# Altium PCB PCB1.PcbDoc
Units mm, origin at the board's own origin, x right, y up, seen from the top; angles counter-clockwise.
Board outline 90 x 60 mm, 2 copper layers (Top Layer, Bottom Layer); 51 components, 53 nets, 228 pads, 11 vias.
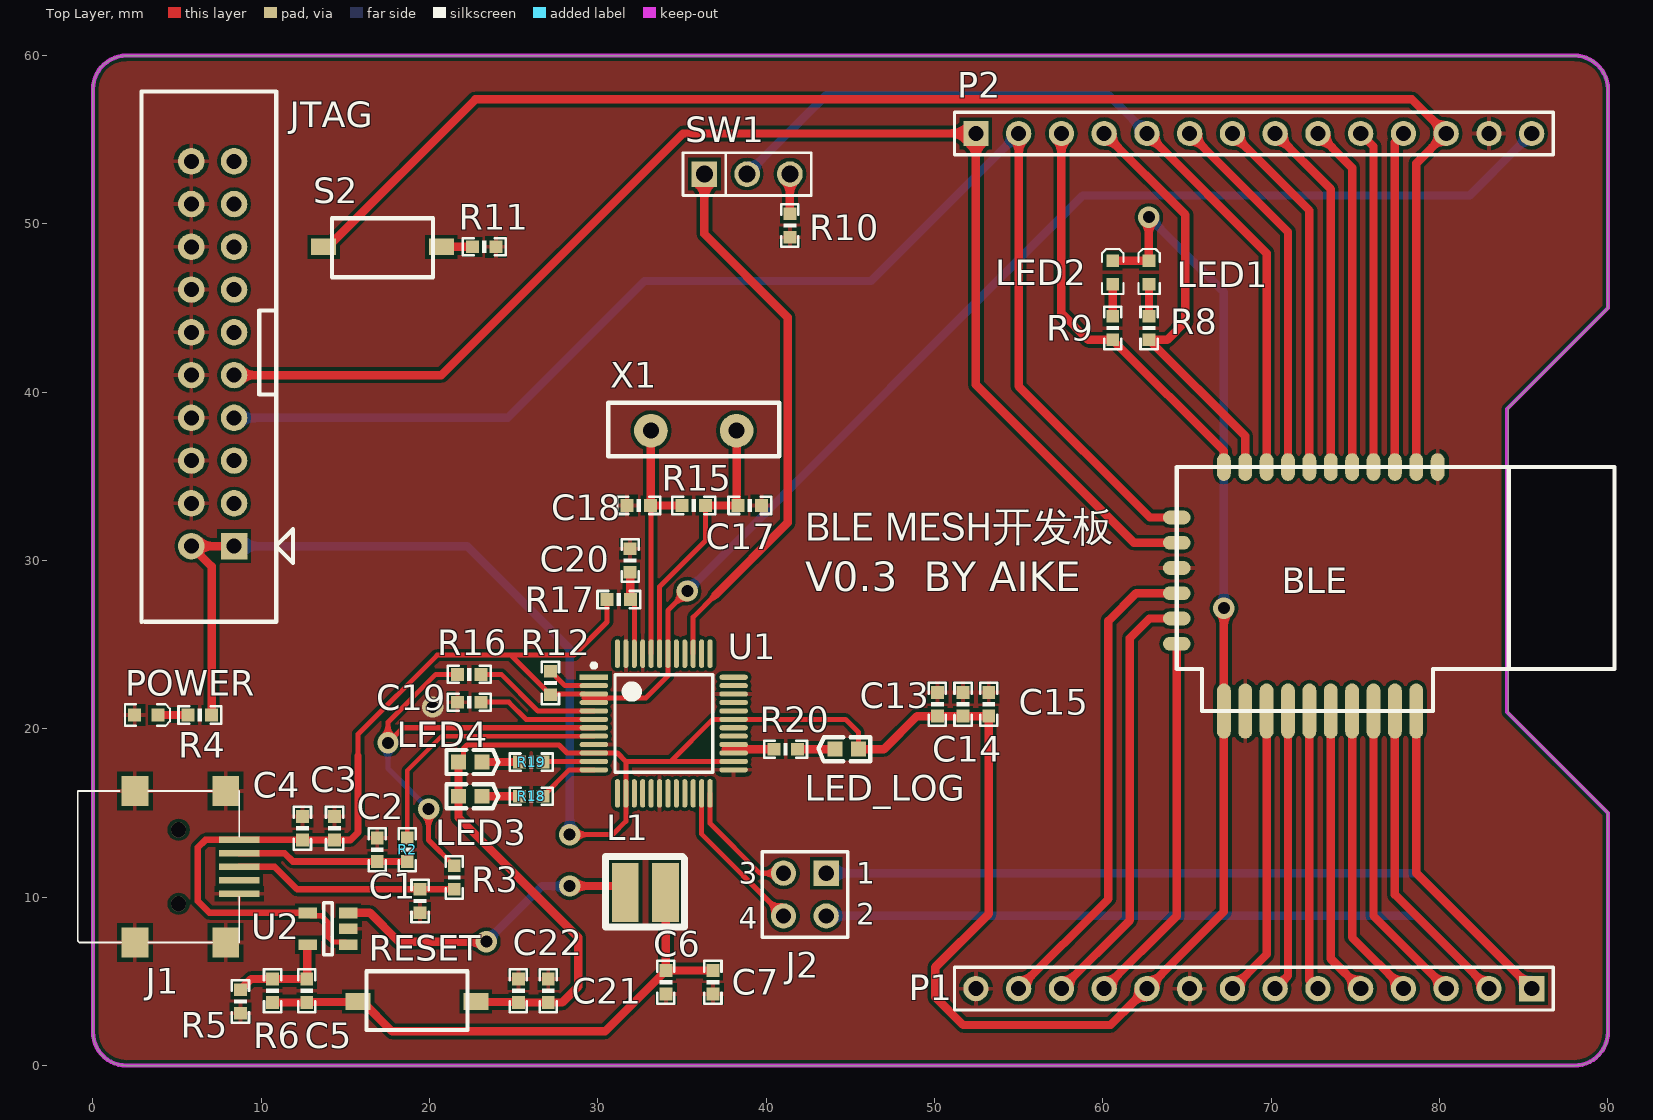
[diagram p0: Top Layer view]
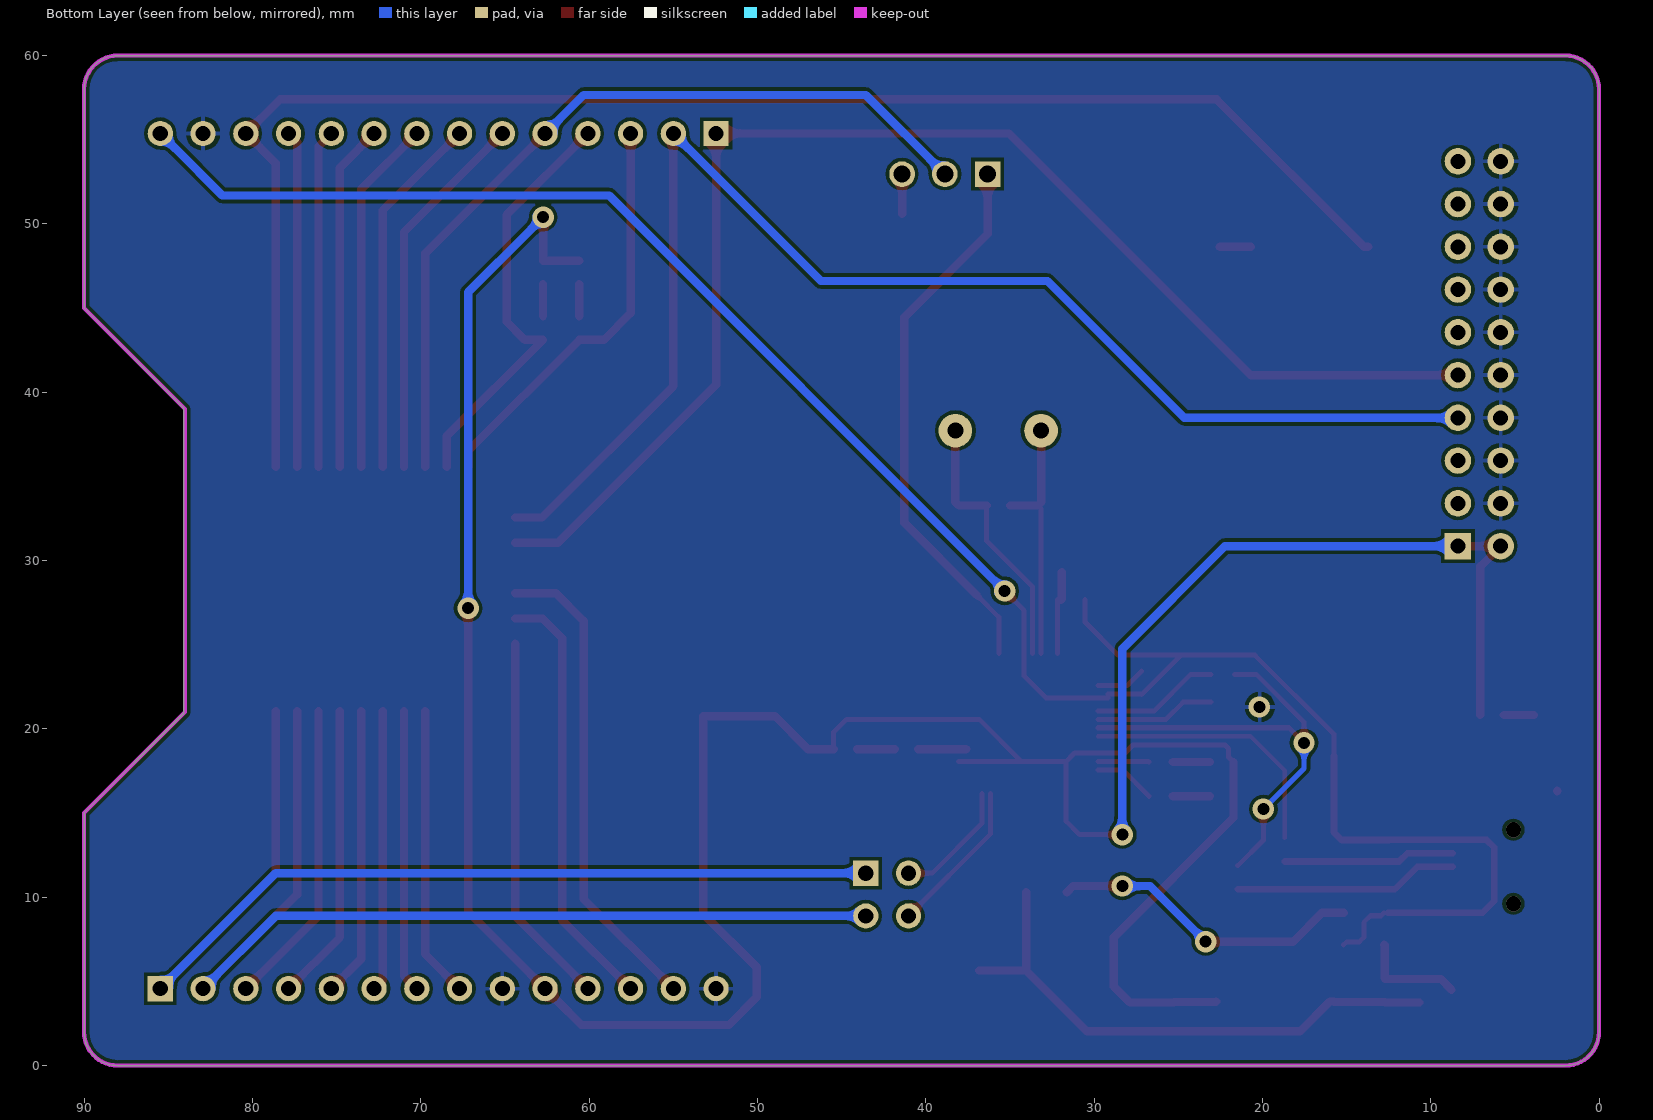
[diagram p1: Bottom Layer view, seen from below]

## Layer stack, top to bottom
Top Solder: solder mask 0.0102, Solder Resist, Dk 3.5
Top Layer: signal copper 0.0356
Dielectric 1: dielectric 0.32, FR-4, Dk 4.8
Bottom Layer: signal copper 0.0356
Bottom Solder: solder mask 0.0102, Solder Resist, Dk 3.5

## Board outline
0,2 0,58 cw(c2,58) 2,60 88,60 cw(c88,58) 90,58 90,45 84.074,39.074 84.074,20.926 90,15 90,2 cw(c88,2) 88,0 2,0 cw(c2,2)

## Design rules (kind name [scope] priority, off if disabled: settings)
Clearance Clearance_2 [InPolygon] p1: gap=0.2 ignorepadtopadclearanceinfootprint=TRUE
Clearance Clearance_1 [IsPad and InComponent(U1)] p2: gap=0.127 ignorepadtopadclearanceinfootprint=TRUE
Clearance [All] p3: gap=0.152 ignorepadtopadclearanceinfootprint=TRUE
DiffPairsRouting [All] p1: maxlimit=2.54 minlimit=0.025 mostfreqgap=0.254 toplayer_minwidth=0.025 toplayer_maxwidth=2.54 toplayer_prefwidth=0.381 bottomlayer_minwidth=0.025 bottomlayer_maxwidth=2.54 bottomlayer_prefwidth=0.381 maxuncoupledlength=12.7
PlaneClearance [All] p1: clearance=2
PolygonConnect [All] p1: connectstyle=Relief reliefconductorwidth=0.254 reliefentries=4 polygonreliefangle="90 Angle" airgapwidth=0.254
RoutingCorners [All] p1: cornerstyle=45-Degree minsetback=0.254 maxsetback=2.54
RoutingVias [All] p1: holewidth=0.711 width=1.27 viastyle="Through Hole" minholewidth=0 minwidth=0 maxholewidth=2.54 maxwidth=2.54
ShortCircuit [All] p1: allowed=TRUE
SolderMaskExpansion [All] p1: expansion=0.102
Width [All] p1: maxlimit=2.54 minlimit=0.01 preferedwidth=0.254
26 further rules are at their usual default settings.

## Components (designator, comment, footprint, x,y, rotation, side; value= is the part's Value field where it differs from the comment)
BLE "BLE" BLE 64.383,35.56 r270 top
C1 "27pF,25V" 0603P 19.431,9.779 r90 top
C2 "27pF,25V" 0603P 16.891,12.827 r270 top
C3 "10uF,10V" 0603P 14.351,14.097 r90 top
C4 "100nF,10V" 0603P 12.446,14.097 r90 top
C5 "27pF,25V" 0603P 12.7,4.445 r270 top
C6 "10uF,10V" 0603P 34.036,4.953 r90 top
C7 "100nF,10V" 0603P 36.83,4.953 r270 top
C13 "100nF" 0603P 50.165,21.463 r90 top
C14 "100nF" 0603P 51.689,21.463 r90 top
C15 "100nF" 0603P 53.213,21.463 r90 top
C17 "27pF" 0603P 39.025,33.275 r0 top
C18 "27pF" 0603P 32.425,33.275 r180 top
C19 "33nF" 0603P 22.352,21.59 r180 top
C20 "0.1uF" 0603P 31.909,30.004 r270 top
C21 "0.1uF" 0603P 27.051,4.445 r270 top
C22 "0.1uF" 0603P 25.273,4.445 r270 top
J1 "miniUSB-A" USB-min 5.588,11.811 r0 top
J2 "Header 2X2" HDR2X2 43.561,11.43 r180 top
JTAG "JTAG-20PIN" IDC20_JTAG 10.882,26.361 r90 top
L1 "2.2uH" Inductor 30.823,12.037 r270 top value=100uH
LED1 "Red" D0603 62.738,47.117 r0 top
LED2 "Green" D0603 60.579,47.117 r0 top (schematic designator LD2)
LED3 "LEDTX" LED_0603 21.717,16.002 r0 top
LED4 "LEDRX" LED_0603 21.717,18.034 r0 top
LED_LOG "LEDLOG" LED_0603 45.466,18.796 r180 top (schematic designator LED5)
P1 "Header 14" HDR1X14 85.471,4.572 r180 top
P2 "Header 14" HDR1X14 52.451,55.372 r0 top
POWER "Red" D0603 3.175,20.828 r270 top (schematic designator LED1)
R2 "27R" 0603P 18.669,12.827 r90 top
R3 "27R" 0603P 21.463,11.176 r90 top
R4 "1K" 0603P 6.35,20.828 r180 top
R5 "150K" 0603P 8.763,3.81 r270 top
R6 "680K" 0603P 10.668,4.445 r270 top
R8 "2K" 0603P 62.738,43.815 r270 top
R9 "2K" 0603P 60.579,43.815 r270 top
R10 "3.3K" 0603P 41.402,49.911 r90 top
R11 "3.3K" 0603P 23.241,48.641 r0 top
R12 "10K" 0603P 27.178,22.733 r270 top
R15 "1M" 0603P 35.687,33.274 r0 top
R16 "1.5K" 0603P 22.352,23.241 r0 top
R17 "470R" 0603P 31.242,27.686 r0 top
R18 "220R" 0603P 26.035,16.002 r180 top
R19 "220R" 0603P 26.035,18.034 r180 top
R20 "220R" 0603P 41.148,18.796 r0 top
RESET "SW-PB" buttom_sp 16.248,2.11 r0 top (schematic designator S1)
S2 "SW-PB" buttom_sp 20.201,50.341 r180 top
SW1 "SW-SPDT" SIP3 36.322,52.959 r0 top
U1 "FT2232D" TQFN48 33.909,20.32 r0 top
U2 "TLV62565DBVR" DBV0005A 13.97,8.128 r180 top value=Value
X1 "XTAL" XTAL 33.147,37.719 r0 top

## Footprints (in the part's own frame and the unit in brackets; to place one, negate y for a bottom-side part, rotate by r counter-clockwise, add the part's x,y. Pads: shape width x height; smd on the part's side, far side on the other; paste and mask are expansions set on the pad)
0603P [mil]
  rect 30x30 smd: 1(-27.5,0) 2(27.5,0)
  silkscreen extent -50,-20 50,20
BLE [mm]
  rrect100% 3.28x0.82 smd: 1(14.5,14.23) 2(14.5,12.96) 3(14.5,11.69) 4(14.5,10.42) 5(14.5,9.15) 6(14.5,7.88) 7(14.5,6.61) 8(14.5,5.34) 9(14.5,4.07) 10(14.5,2.8)
  rrect100% 0.82x1.64 smd: 11(10.5,0) 12(9,0) 13(7.5,0) 14(6,0) 15(4.5,0) 16(3,0)
  rrect100% 1.64x0.82 smd: 17(0,2.8) 18(0,4.07) 19(0,5.34) 20(0,6.61) 21(0,7.88) 22(0,9.15) 23(0,10.42) 24(0,11.69) 25(0,12.96) 26(0,14.23) 27(0,15.5)
  silkscreen extent 0,0 14.5,26
buttom_sp [mm]
  rect 1.5x1 smd: 1(-0.5,1.7) 2(6.5,1.7)
  silkscreen extent 0,0 6,3.5
D0603 [mil]
  rect 30x30 smd: 1(0,27.5) 2(0,-27.5)
  silkscreen extent -25,-50 25,55
DBV0005A [mm]
  rect 1.1x0.65 smd paste-0.102 mask+0.051: 1(-1.2,0.95) 2(-1.2,0) 3(-1.2,-0.95) 4(1.2,-0.95) 5(1.2,0.95)
  silkscreen extent -0.25,-1.55 0.25,1.55, body extent 0,0 0.25,0.25, height 0.25
HDR1X14 [mm] "Connector; Header; 14 Position"
  rect 1.5x1.5 hole 0.9: 1(0,0)
  round 1.5 hole 0.9: 2(2.54,0) 3(5.08,0) 4(7.62,0) 5(10.16,0) 6(12.7,0) 7(15.24,0) 8(17.78,0) 9(20.32,0) 10(22.86,0) 11(25.4,0) 12(27.94,0) 13(30.48,0) 14(33.02,0)
  silkscreen extent -1.27,-1.27 34.29,1.27
HDR2X2 [mm] "Connector; Header; 2x2 Position"
  rect 1.5x1.5 hole 0.9: 1(0,0)
  round 1.5 hole 0.9: 2(0,2.54) 3(2.54,0) 4(2.54,2.54)
  silkscreen extent -1.27,-1.27 3.81,3.81
IDC20_JTAG [mil] "for 20-pin JTAG"
  rect 62x62 hole 35: 1(177.16,98.43)
  round 62 hole 35: 2(177.16,198.43) 3(277.16,98.43) 4(277.16,198.43) 5(377.16,98.43) 6(377.16,198.43) 7(477.16,98.43) 8(477.16,198.43) 9(577.16,98.43) 10(577.16,198.43) 11(677.16,98.43) 12(677.16,198.43) 13(777.16,98.43) 14(777.16,198.43) 15(877.16,98.43) 16(877.16,198.43) 17(977.16,98.43) 18(977.16,198.43) 19(1077.16,98.43) 20(1077.16,198.43)
  silkscreen extent 0,-39 1240,315
Inductor [mm] "Chip Inductor, Body 0.6x0.3mm, IPC High Density"
  rect 3.5x1.6 smd: 1(1.75,0.8) 2(1.75,3.2)
  silkscreen extent -0.38,-0.38 3.81,4.32
LED_0603 [mil]
  rect 35x35 smd: 1(0,0) 2(55,0)
  silkscreen extent -28,-28 93,28
SIP3 [mil]
  rect 60x60 hole 40: 1(0,0)
  round 60 hole 40: 2(100,0) 3(200,0)
  silkscreen extent -50,-50 250,50
TQFN48 [mm]
  rect 1.7x0.3 smd: 1(-4.15,2.75)
  oval 1.7x0.3 smd: 2(-4.15,2.25) 3(-4.15,1.75) 4(-4.15,1.25) 5(-4.15,0.75) 6(-4.15,0.25) 7(-4.15,-0.25) 8(-4.15,-0.75) 9(-4.15,-1.25) 10(-4.15,-1.75) 11(-4.15,-2.25) 12(-4.15,-2.75) 25(4.15,-2.75) 26(4.15,-2.25) 27(4.15,-1.75) 28(4.15,-1.25) 29(4.15,-0.75) 30(4.15,-0.25) 31(4.15,0.25) 32(4.15,0.75) 33(4.15,1.25) 34(4.15,1.75) 35(4.15,2.25) 36(4.15,2.75)
  oval 0.3x1.7 smd: 13(-2.75,-4.15) 14(-2.25,-4.15) 15(-1.75,-4.15) 16(-1.25,-4.15) 17(-0.75,-4.15) 18(-0.25,-4.15) 19(0.25,-4.15) 20(0.75,-4.15) 21(1.25,-4.15) 22(1.75,-4.15) 23(2.25,-4.15) 24(2.75,-4.15) 37(2.75,4.15) 38(2.25,4.15) 39(1.75,4.15) 40(1.25,4.15) 41(0.75,4.15) 42(0.25,4.15) 43(-0.25,4.15) 44(-0.75,4.15) 45(-1.25,4.15) 46(-1.75,4.15) 47(-2.25,4.15) 48(-2.75,4.15)
  silkscreen extent -4.27,-2.9 2.9,3.57, body extent -3.6,-3.6 3.6,3.6, height 1.6
USB-min [mm]
  rect 1.6x1.8 smd: 0(-3.1,-4.5) 0(-3.1,4.5) 0(2.3,-4.5) 0(2.3,4.5)
  rect 2.4x0.4 smd: 1(3.1,1.6) 2(3.1,0.8) 3(3.1,0) 4(3.1,-0.8) 5(3.1,-1.6)
  silkscreen extent -6.5,-4.5 3.1,4.5
XTAL [mm]
  round 2 hole 0.95: 1(0,0) 2(5.09,0)
  silkscreen extent -2.54,-1.52 7.62,1.65

## Part data
C1 C2 C3 C4 C5 C6 C7 C13 C14 C15 C17 C18 C19 C20 C21 C22: library part CAP, "Capacitor"
J1: "miniUSB-A  interface"
J2: "Header, 2-Pin, Dual row", LatestRevisionDate=17-Jul-2002, LatestRevisionNote="Re-released for DXP Platform.", Publisher="Altium Limited"
JTAG: library part ARM_JTAG, "ARM_JTAG-20PIN"
L1: library part Inductor, "Inductor", Published=8-Jun-2000, Publisher="Altium Limited", Revision="July-2002: Re-released for DXP Platform."
LED1 LED2 POWER: library part LED2, "Typical RED, GREEN, YELLOW, AMBER GaAs LED", Published=8-Jun-2000, Publisher="Altium Limited", Revision="July-2002: Re-released for DXP Platform."
LED3 LED4 LED_LOG: library part LED, Part Field 1=0, Part Field 2=0, Part Field 3=0, Part Field 4=0, Part Field 5=1, Part Field 6=0, Part Field 7=1n, Part Field 8=1n, Part Field 9=500n, Part Field 10=1u
P1 P2: "Header, 14-Pin", LatestRevisionDate=17-Jul-2002, LatestRevisionNote="Re-released for DXP Platform.", Publisher="Altium Limited"
R2 R3 R4 R5 R6 R8 R9 R10 R11 R12 R15 R16 R17 R18 R19 R20: library part R, Bottom=30, Right=20
RESET S2: "Switch", LatestRevisionDate=17-Jul-2002, LatestRevisionNote="Re-released for DXP Platform.", PackageDescription="Switch; 2 Leads", PackageReference=SPST-2, Published=24-Mar-1999, Publisher="Altium Limited"
SW1: "SPDT Subminiature Toggle Switch, Right Angle Mounting, Vertical Actuation", Datasheet="Latest Revision: 05-Dec-2000", Published=24-Mar-1999, Publisher="Altium Limited", Revision 1="Jul-2002: Re-released for DXP Platform.", Revision 2="17-Dec-2003: Schematic revised, PCB Footprint replaced."
U1: library part FD2232D
U2: "Imported", Alternate_Manufacturer=None, CurrentDate=07/22/2019, CurrentTime=20:07:01, Manufacturer="Texas Instruments", PartNumber=TLV62565DBV, Address1="Not shown in title block", Address2="Not shown in title block", Address3="Not shown in title block", Address4="Not shown in title block", ApprovedBy="Not shown in title block", Author="Not shown in title block", CheckedBy="Not shown in title block", CompanyName="Not shown in title block", ComponentLink1Description="Datasheet Link", ComponentLink1URL=http://www.ti.com/lit/ds/symlink/tlv62565.pdf, CompType=IC, Date="Not shown in title block", DocumentFullPathAndName=C:\Users\user\Desktop\UGEN_7001_DEV_BOARD_V1\PCB_Project\Sheet1.SchDoc, DocumentName=Sheet1.SchDoc, DocumentNumber=1, Engineer="Not shown in title block", ImagePath="Not shown in title block", LatestRevisionDate=2014-02-20, ModifiedDate=07/22/2019, MountType=SMT, Organization="Not shown in title block", PackageReference=DBV0005A, PIN_COUNT=5, ProjectName=PCB_Project.PrjPcb, Publisher="Texas Instruments", RefDes=Refdes, Revision="Use project parameter SCH_Rev", RoHS=Y, SheetNumber=1, SheetTotal=1, SymbolCreator=a0411947, SymbolVersion=2014-02-06, Time="Not shown in title block", Type=Type, U/M=EA
X1: =6M

## Via types
v1: diameter 1.27, hole 0.711, Top Layer to Bottom Layer, 9 vias
v2: diameter 0.9, hole 0.9, Top Layer to Bottom Layer, 2 vias

## Nets (pads, with @x,y where several pads share a name; then routed paths per layer and width w, separated by ;. In a path a pad name is that pad's centre, name@x,y a point inside that pad or via, vN(x,y) a via of type N, cw(c..) or ccw(c..) an arc to the next point about the centre after c; other vN are vias at no path point)
ADC1: BLE.3 P1.3 | length 20.2
  Top Layer w0.5: BLE.3 76.073,8.89 P1.3 ; P1.3@79.895,4.595 ccw(c78.85,4.65) 79.525,5.45 ccw(c80.325,6.125) P1.3@80.38,5.08
ADC2: BLE.11 P1.11 | length 24.2
  Top Layer w0.5: P1.11 64.383,8.884 BLE.11 ; P1.11@60.095,5.08 ccw(c60.15,6.125) 60.95,5.45 ccw(c61.625,4.65) P1.11@60.58,4.595
FT_RX: J2.4 U1.23 | length 10.8
  Top Layer w0.3: U1.23 36.159,13.752 J2.4 ; J2.4@40.423,9.002 ccw(c39.478,9.11) 40.225,9.7 ccw(c40.815,10.447) J2.4@40.923,9.502
FT_TX: J2.3 U1.24 | length 8.7
  Top Layer w0.3: U1.24 36.659,14.391 39.62,11.43 J2.3 ; J2.3@40.486,11.148 ccw(c39.811,10.473) 39.875,11.425 ccw(c39.811,12.377) J2.3@40.486,11.702
GND: BLE.9 BLE.14 BLE.27 C1.1 C2.1 C3.2 C4.2 C6.1 C7.2 C13.2 C14.2 C15.2 C17.2 C18.2 C19.2 C20.1 C21.1 C22.1 J1.0 J1.5 JTAG.4 JTAG.6 JTAG.8 JTAG.10 JTAG.12 JTAG.14 JTAG.16 JTAG.18 JTAG.20 P1.9 P1.14 P2.13 POWER.2 R5.2 R10.1 R11.2 U1.9 U1.18 U1.25 U1.34 U1.45 U1.47 U2.2 | length 0
  Top Layer w0.508: J1.0@2.477,16.322 J1.0@2.488,16.311
  other v1: 20.175,21.3
GPIO0_0: BLE.17 P2.3 R9.2 | length 26.5
  Top Layer w0.5: P2.3@57.171,55.02 cw(c56.356,54.179) 57.527,54.209 ; 57.525,54.2 cw(c58.696,54.169) P2.3@57.881,55.011 ; P2.3 57.531,44.704 59.118,43.117 R9.2 67.183,36.513 BLE.17
GPIO0_1: BLE.18 P2.4 R8.2 | length 27.6
  Top Layer w0.5: P2.4 64.897,50.546 64.897,44.196 63.818,43.117 R8.2 68.453,37.402 BLE.18 ; P2.4@60.095,54.87 cw(c60.15,53.825) 60.95,54.5 cw(c61.625,55.3) P2.4@60.58,55.355
I2C_SCL: BLE.13 P1.13 | length 30.7
  Top Layer w0.5: P1.13 60.325,9.906 60.325,26.416 61.969,28.06 BLE.13 ; P1.13@54.995,5.08 ccw(c55.05,6.125) 55.85,5.45 ccw(c56.525,4.65) P1.13@55.48,4.595
I2C_SDA: BLE.12 P1.12 | length 27.7
  Top Layer w0.5: P1.12 61.595,8.636 61.595,25.4 62.755,26.56 BLE.12 ; P1.12@57.545,5.08 ccw(c57.6,6.125) 58.4,5.45 ccw(c59.075,4.65) P1.12@58.03,4.595
LOG_TX: SW1.1 U1.39 | length 35.4
  Top Layer w0.3: U1.39 35.659,26.642 36.983,27.966 ; 36.884,27.998 cw(c35.978,28.29) 36.725,27.7 cw(c37.315,26.953) 37.019,27.858
  Top Layer w0.5: SW1.1@35.971,52.32 cw(c35.156,51.479) 36.327,51.509 ; SW1.1 36.322,49.403 41.275,44.45 41.275,32.258 36.983,27.966 ; 36.325,51.5 cw(c37.496,51.469) SW1.1@36.681,52.311
LTX: BLE.19 P2.5 SW1.2 | length 55.2
  Top Layer w0.5: P2.5 69.723,48.26 BLE.19 ; P2.5@62.62,54.87 cw(c62.675,53.825) 63.475,54.5 cw(c64.15,55.3) P2.5@63.105,55.355
  Bottom Layer w0.5: SW1.2 43.561,57.658 60.325,57.658 P2.5 ; SW1.2@38.895,53.48 ccw(c38.95,54.525) 39.75,53.85 ccw(c40.425,53.05) SW1.2@39.38,52.995 ; P2.5@62.095,55.395 ccw(c61.05,55.45) 61.725,56.25 ccw(c62.525,56.925) P2.5@62.58,55.88
NetC1_2: C1.2 J1.3 R3.1 | length 13.3
  Top Layer w0.4: J1.3 10.795,11.811 12.129,10.477 C1.2 R3.1
NetC2_2: C2.2 J1.2 R2.1 | length 10.2
  Top Layer w0.4: J1.2 11.392,12.611 11.874,12.129 C2.2 R2.1
NetC5_1: C5.1 R5.1 R6.1 U2.5 | length 6.3
  Top Layer w0.5: R5.1 9.398,5.144 R6.1 C5.1 12.735,5.179 12.735,7.143 U2.5
NetC5_2: C5.2 C6.2 C7.1 L1.2 R6.2 RESET.1 | length 33.1
  Top Layer w0.5: R6.2 C5.2 12.732,3.778 15.716,3.778 RESET.1 15.998,3.81 17.776,2.032 30.417,2.032 C6.2 ; L1.2 34.036,10.274 C6.2 ; C7.1 C6.2
NetC17_1: C17.1 R15.2 U1.43 X1.2 | length 16.1
  Top Layer w0.3: U1.43 33.659,28.452 36.385,31.178 R15.2
  Top Layer w0.5: R15.2 38.036,33.274 38.237,33.475 X1.2
NetC18_1: C18.1 R15.1 U1.44 X1.1 | length 15.1
  Top Layer w0.3: U1.44 33.159,33.095 C18.1@33.338,33.274
  Top Layer w0.5: X1.1 33.147,33.465 33.338,33.274 R15.1
NetC19_1: C19.1 U1.6 | length 7.1
  Top Layer w0.3: C19.1 24.702,21.59 25.722,20.57 U1.6
NetC20_2: C20.2 R17.2 U1.46 | length 4.8
  Top Layer w0.3: U1.46 R17.2@32.159,27.686
  Top Layer w0.5: C20.2 31.925,29.29 31.925,27.702 R17.2
NetL1_1: L1.1 U2.3 | length 25.1
  Top Layer w0.5: U2.3 16.449,9.078 18.161,7.366 v1(23.368,7.366) ; v1@23.101,7.63 cw(c22.348,8.528) 22.379,7.357 cw(c22.348,6.185) v1@23.117,7.069 ; v1(28.321,10.668) 31.242,10.668 L1.1 ; v1@28.583,10.956 ccw(c29.352,11.84) 29.321,10.668 ccw(c29.352,9.497) v1@28.599,10.395
  Bottom Layer w0.5: v1@23.245,7.73 ccw(c23.3,8.775) 23.975,7.975 ccw(c24.775,7.3) v1@23.73,7.245 ; v1(23.368,7.366) 26.67,10.668 v1(28.321,10.668) ; v1@28.051,10.93 cw(c27.298,11.828) 27.329,10.657 cw(c27.298,9.485) v1@28.067,10.369
NetLED1_2: LED1.2 R8.1 | length 1.9
  Top Layer w0.5: R8.1 LED1.2
NetLED2_2: LED2.2 R9.1 | length 1.9
  Top Layer w0.5: R9.1 LED2.2
NetLED3_2: LED3.2 R18.2 | length 2.2
  Top Layer w0.5: LED3.2 R18.2
NetLED4_2: LED4.2 R19.2 | length 2.2
  Top Layer w0.5: LED4.2 R19.2
NetLED_LOG_2: LED_LOG.2 R20.2 | length 2.2
  Top Layer w0.5: R20.2 LED_LOG.2
NetPOWER_1: POWER.1 R4.2 | length 1.8
  Top Layer w0.5: POWER.1 R4.2
NetR2_2: R2.2 U1.8 | length 15.9
  Top Layer w0.254: R2.2 18.669,17.526 20.713,19.57 U1.8
NetR3_2: R3.2 R16.1 U1.7 | length 32.2
  Top Layer w0.3: v1@17.248,19.589 ccw(c16.573,20.264) 17.525,20.2 ccw(c18.477,20.264) 17.526,20.186 ; v1@17.802,19.589 cw(c18.477,20.264) 17.526,20.186 ; v1@19.662,14.836 cw(c18.987,14.16) 19.939,14.224 ; v1(19.939,15.24) 19.939,14.224 ; v1@20.216,14.836 ccw(c20.891,14.16) 19.939,14.224 ; R3.2 19.939,13.398 19.939,14.224 ; R16.1 20.366,23.241 17.526,20.401 17.526,20.186 ; U1.7 18.419,20.07 v1(17.526,19.177) 17.526,20.186
  Bottom Layer w0.3: v1@17.248,18.761 cw(c16.573,18.086) 17.525,18.15 cw(c18.477,18.086) v1@17.802,18.761 ; v1(17.526,19.177) 17.526,17.653 v1(19.939,15.24)
NetR10_2: R10.2 SW1.3 | length 4.2
  Top Layer w0.5: SW1.3@41.046,52.595 cw(c40.231,51.754) 41.402,51.784 ; 41.4,51.775 cw(c42.571,51.744) SW1.3@41.756,52.586 ; R10.2 SW1.3
NetR11_1: R11.1 S2.1 | length 1.8
  Top Layer w0.5: S2.1 R11.1
NetR12_1: R12.1 U1.2 | length 2.9
  Top Layer w0.3: R12.1 28.04,22.57 U1.2
NetR16_2: R16.2 U1.5 | length 7.6
  Top Layer w0.3: R16.2 24.257,23.241 26.428,21.07 U1.5
NetR18_1: R18.1 U1.12 | length 3.7
  Top Layer w0.3: R18.1 28.302,17.57 U1.12
NetR19_1: R19.1 U1.11 | length 3
  Top Layer w0.3: R19.1 26.77,18.07 U1.11
NetR20_1: R20.1 U1.27 U1.28 | length 5.2
  Top Layer w0.5: 37.592,18.796 R20.1 38.059,18.796
PWM1: BLE.8 P1.8 | length 19.3
  Top Layer w0.5: P1.8 69.723,6.604 BLE.8 ; P1.8@67.72,5.08 ccw(c67.775,6.125) 68.575,5.45 ; P1.8@68.18,4.57 cw(c69.225,4.625) 68.55,5.425
PWM2: BLE.7 P1.7 | length 18.7
  Top Layer w0.5: P1.7@70.138,4.964 ccw(c70.193,6.009) 70.993,5.334 ; P1.7 70.993,5.334 ; P1.7@70.623,4.479 cw(c71.668,4.534) 70.993,5.334 ; BLE.7 70.993,5.334
PWM3: BLE.6 P1.6 | length 16.7
  Top Layer w0.5: BLE.6 72.263,5.08 P1.6
PWM4: BLE.5 P1.5 | length 19.2
  Top Layer w0.5: BLE.5 73.533,6.35 P1.5 ; P1.5@74.792,4.606 ccw(c73.747,4.661) 74.422,5.461 ccw(c75.222,6.136) P1.5@75.277,5.091
PWM5: BLE.4 P1.4 | length 19.7
  Top Layer w0.5: BLE.4 74.803,7.62 P1.4 ; P1.4@77.345,4.595 ccw(c76.3,4.65) 76.975,5.45 ccw(c77.775,6.125) P1.4@77.83,5.08
RST_N: BLE.26 P2.12 S2.2 | length 95.6
  Top Layer w0.5: S2.2 13.951,48.641 22.714,57.404 78.359,57.404 P2.12 78.613,53.594 BLE.26 ; P2.12@79.895,55.38 cw(c78.85,55.325) 79.525,54.525 cw(c80.325,53.85) P2.12@80.38,54.895 ; P2.12@79.895,55.395 ccw(c78.85,55.45) 79.525,56.25 ccw(c80.325,56.925) P2.12@80.38,55.88
SPI_CLK: BLE.22 P2.8 | length 23.1
  Top Layer w0.5: P2.8 73.533,52.07 BLE.22 ; P2.8@70.245,54.87 cw(c70.3,53.825) 71.1,54.5 cw(c71.775,55.3) P2.8@70.73,55.355
SPI_CSN: BLE.25 P2.11 | length 20
  Top Layer w0.5: BLE.25 77.343,54.864 P2.11
SPI_MISO: BLE.23 P2.9 | length 22.6
  Top Layer w0.5: P2.9 74.803,53.34 BLE.23 ; P2.9@72.795,54.87 cw(c72.85,53.825) 73.65,54.5 cw(c74.325,55.3) P2.9@73.28,55.355
SPI_MOSI: BLE.24 P2.10 | length 20.1
  Top Layer w0.5: P2.10 76.073,54.61 BLE.24
SWDCLK: BLE.15 JTAG.9 P2.1 | length 86
  Top Layer w0.5: JTAG.9 20.701,41.021 35.052,55.372 51.084,55.372 ; JTAG.9@8.858,41.306 ccw(c9.627,42.19) 9.596,41.018 ccw(c9.627,39.847) JTAG.9@8.874,40.745 ; 51.025,55.375 cw(c50.994,54.204) 51.056,55.374 ; 51.034,55.373 ccw(c51.004,56.544) 51.056,55.374 ; 51.048,55.378 cw(c50.959,54.21) P2.1@51.8,55.025 ; P2.1@51.845,55.729 cw(c51.004,56.544) 51.056,55.374 ; P2.1@52.096,54.72 cw(c51.281,53.879) 52.451,53.935 ; 52.45,53.9 cw(c53.621,53.869) 52.451,53.927 ; 52.452,53.909 ccw(c51.281,53.879) 52.451,53.931 ; P2.1@52.806,54.711 ccw(c53.621,53.869) 52.451,53.931 ; BLE.15 61.84,31.06 52.451,40.449 52.451,53.927 ; 51.056,55.374 cw(c50.994,54.204) 51.084,55.372 ; 51.084,55.372 P2.1 52.451,53.935 ; 52.451,53.927 cw(c53.621,53.869) 52.451,53.931 ; 52.451,53.927 52.451,53.935 ; 52.451,53.931 ccw(c51.281,53.879) 52.451,53.935
SWDIO: BLE.16 JTAG.7 P2.2 | length 86.6
  Top Layer w0.5: P2.2@54.646,55.045 cw(c53.831,54.204) 55.002,54.234 ; P2.2 54.991,40.359 62.79,32.56 BLE.16 ; 55,54.225 cw(c56.171,54.194) P2.2@55.356,55.036
  Bottom Layer w0.5: JTAG.7 24.638,38.481 32.766,46.609 46.228,46.609 P2.2 ; JTAG.7@8.858,38.756 ccw(c9.627,39.64) 9.596,38.468 ccw(c9.627,37.297) JTAG.7@8.874,38.195 ; P2.2@54.495,55.355 cw(c53.45,55.3) 54.125,54.5 cw(c54.925,53.825) P2.2@54.98,54.87
UART_CTX: BLE.20 P2.6 | length 24.2
  Top Layer w0.5: P2.6 70.993,49.53 BLE.20 ; P2.6@65.17,54.87 cw(c65.225,53.825) 66.025,54.5 cw(c66.7,55.3) P2.6@65.655,55.355
UART_RTX: BLE.21 P2.7 | length 23.6
  Top Layer w0.5: P2.7 72.263,50.8 BLE.21 ; P2.7@67.695,54.87 cw(c67.75,53.825) 68.55,54.5 cw(c69.225,55.3) P2.7@68.18,55.355
UART_RX: BLE.1 J2.1 P1.1 | length 69.5
  Top Layer w0.5: BLE.1 78.613,11.43 P1.1 ; P1.1@84.97,4.595 ccw(c83.925,4.65) 84.6,5.45 ccw(c85.4,6.125) P1.1@85.455,5.08
  Bottom Layer w0.5: J2.1 78.613,11.43 P1.1 ; J2.1@44.158,11.731 ccw(c44.927,12.615) 44.896,11.443 ccw(c44.927,10.272) J2.1@44.174,11.17 ; P1.1@84.945,4.62 ccw(c83.9,4.675) 84.575,5.475 ccw(c85.375,6.15) P1.1@85.43,5.105
UART_TX: BLE.2 J2.2 P1.2 | length 65.4
  Top Layer w0.5: BLE.2 77.343,10.16 P1.2 ; P1.2@82.42,4.595 ccw(c81.375,4.65) 82.05,5.45 ccw(c82.85,6.125) P1.2@82.905,5.08
  Bottom Layer w0.5: J2.2 78.613,8.89 P1.2 ; J2.2@44.008,9.181 ccw(c44.777,10.065) 44.746,8.893 ccw(c44.777,7.722) J2.2@44.024,8.62 ; P1.2@82.42,4.595 ccw(c81.375,4.65) 82.05,5.45 ccw(c82.85,6.125) P1.2@82.905,5.08
V5: C3.1 C4.1 J1.1 P2.14 R12.2 R17.1 U1.3 U1.4 U1.42 U2.1 U2.4 | length 130.9
  Top Layer w0.3: U2.4 12.945,8.903 13.576,8.903 13.97,8.509 13.97,7.62 14.237,7.353 14.995,7.353 U2.1 ; 15.748,18.415 15.748,19.685 20.447,24.384 24.829,24.384 ; R12.2 24.829,24.384 ; R12.2@27.213,22.07 U1.3@29.175,22.07 ; 29.175,21.85 29.181,21.844 32.844,21.844 34.159,23.159 U1.42 34.159,27.047 v1(35.306,28.194) ; R17.1 30.543,26.352 28.575,24.384 24.829,24.384 ; v1@34.821,28.208 cw(c33.875,28.1) 34.622,27.51 cw(c35.212,26.763) v1@35.32,27.709
  Top Layer w0.4: U2.4@12.545,9.078 6.924,9.078 6.223,9.779 6.223,12.954 6.68,13.411 J1.1 12.433,13.411 C4.1 C3.1 15.303,13.398 15.748,13.843 15.748,18.415
  Bottom Layer w0.5: v1@35.195,28.58 ccw(c35.25,29.625) 35.925,28.825 ccw(c36.725,28.15) 35.881,28.769 ; v1(35.306,28.194) 35.881,28.769 ; v1@35.68,28.095 cw(c36.725,28.15) 35.881,28.769 ; P2.14@84.97,55.355 cw(c83.925,55.3) 84.73,54.631 ; P2.14@85.455,54.87 ccw(c85.4,53.825) 84.725,54.625 ; P2.14 84.73,54.631 ; 35.881,28.769 58.801,51.689 63.119,51.689 81.788,51.689 84.606,54.507 ; 84.606,54.507 ccw(c85.4,53.825) 84.6,54.5 ccw(c83.925,55.3) 84.725,54.625 ; 84.606,54.507 cw(c85.4,53.825) 84.718,54.619 ; 84.606,54.507 84.718,54.619 ; 84.718,54.619 cw(c85.4,53.825) 84.725,54.625 ; 84.718,54.619 84.73,54.631 ; 84.725,54.625 ccw(c83.925,55.3) 84.73,54.631
VCC: BLE.10 C13.1 C14.1 C15.1 C21.2 C22.2 JTAG.1 JTAG.2 LED1.1 LED2.1 LED3.1 LED4.1 LED_LOG.1 P1.10 R4.1 RESET.2 U1.10 U1.14 U1.26 U1.31 | length 219.4
  Top Layer w0.3: LED4.1 22.012,18.329 22.012,18.837 22.225,19.05 27.686,19.05 28.166,18.57 U1.10 31.159,18.57 31.659,18.07 ; v1(28.321,13.716) 29.337,13.716 ; v1@28.726,13.439 cw(c29.401,12.764) 29.337,13.716 ; v1@28.726,13.993 ccw(c29.401,14.668) 29.337,13.716 ; U1.26 34.32,18.07 ; LED_LOG.1 45.466,19.812 44.708,20.57 U1.31 36.82,20.57 34.32,18.07 ; 29.337,13.716 30.861,13.716 31.659,14.514 U1.14 31.659,18.07 ; 31.659,18.07 34.32,18.07
  Top Layer w0.5: JTAG.2@6.358,31.156 ccw(c7.127,32.04) 7.096,30.868 ccw(c7.127,29.697) 6.991,30.861 ; JTAG.2@6.374,30.595 cw(c7.127,29.697) 6.991,30.861 ; R4.1 7.049,29.654 JTAG.2 6.991,30.861 ; JTAG.1 6.991,30.861 ; LED4.1 LED3.1 21.717,14.732 28.829,7.62 28.829,4.699 27.877,3.747 C21.2 C22.2 25.241,3.778 22.78,3.778 RESET.2 ; LED_LOG.1 46.99,18.796 48.958,20.764 C13.1 C14.1 C15.1 53.213,9.017 50.038,5.842 50.038,4.064 51.689,2.413 60.452,2.413 61.891,3.852 ; LED2.1 LED1.1 62.732,47.822 62.732,49.496 ; P1.10@62.095,4.53 cw(c61.05,4.475) 61.891,3.852 ; v1@62.452,50.122 cw(c61.554,49.369) 62.725,49.4 cw(c63.896,49.369) 62.732,49.496 ; P1.10@62.58,4.045 ccw(c62.525,3) 61.85,3.8 ; P1.10@62.645,5.08 ccw(c62.7,6.125) 63.323,5.284 ; v1(62.725,50.4) 62.732,50.393 62.732,49.496 ; v1@63.013,50.139 ccw(c63.896,49.369) 62.732,49.496 ; P1.10@63.13,4.595 cw(c64.175,4.65) 63.375,5.325 ; v1@66.92,26.901 cw(c66.022,26.148) 67.183,26.307 ; v1(67.183,27.178) 67.183,26.307 ; v1@67.481,26.917 ccw(c68.365,26.148) 67.193,26.179 ccw(c66.022,26.148) 67.183,26.307 ; 61.85,3.8 ccw(c61.05,4.475) 61.891,3.852 ; 61.85,3.8 cw(c61.05,4.475) 61.725,3.675 cw(c62.525,3) 61.85,3.8 ; 61.891,3.852 P1.10 63.323,5.284 ; 63.323,5.284 ccw(c62.7,6.125) 63.375,5.325 ; 63.323,5.284 67.183,9.144 BLE.10 67.183,26.307 ; 63.375,5.325 ccw(c62.7,6.125) 63.5,5.45 ccw(c64.175,4.65) 63.375,5.325
  Bottom Layer w0.5: JTAG.1 9.691,30.861 ; JTAG.1@9.058,31.156 ccw(c9.827,32.04) 9.796,30.868 ccw(c9.827,29.697) 9.691,30.861 ; JTAG.1@9.074,30.595 cw(c9.827,29.697) 9.691,30.861 ; v1@28.044,13.983 ccw(c27.16,14.752) 28.321,14.593 ; v1(28.321,13.716) 28.321,14.593 ; v1@28.605,13.999 cw(c29.503,14.752) 28.332,14.721 cw(c27.16,14.752) 28.321,14.593 ; v1@62.62,50.02 cw(c62.675,48.975) 63.35,49.775 ; v1(62.725,50.4) 63.35,49.775 ; v1@63.105,50.505 ccw(c64.15,50.45) 63.35,49.775 ; v1@66.894,27.433 ccw(c66.01,28.202) 67.182,28.171 ccw(c68.353,28.202) 67.183,28.136 ; v1(67.183,27.178) 67.183,28.136 ; v1@67.455,27.449 cw(c68.353,28.202) 67.183,28.136 ; 9.691,30.861 22.225,30.861 28.321,24.765 28.321,14.593 ; 63.35,49.775 cw(c62.675,48.975) 63.475,49.65 ; 63.35,49.775 ccw(c64.15,50.45) 63.475,49.65 ; 63.35,49.775 63.475,49.65 ; 63.475,49.65 67.183,45.942 67.183,28.136
pads on no net: J1.4 JTAG.3 JTAG.5 JTAG.11 JTAG.13 JTAG.15 JTAG.17 JTAG.19 U1.1 U1.13 U1.15 U1.16 U1.17 U1.19 U1.20 U1.21 U1.22 U1.29 U1.30 U1.32 U1.33 U1.35 U1.36 U1.37 U1.38 U1.40 U1.41 U1.48
copper on no net:
  other v2: 5.088,9.611 5.088,14.011

## Polygon pours and split planes (outlines as drawn)
GND on Top Layer "Top Layer-GND" (solid, remove dead copper, pour order 66): 0,0 90,0 90,60 0,60
GND on Top Layer "Top Layer-GND 1" (solid, pour order 64): 0.127,58.293
no net on Top Layer "Top Layer-No Net" (solid, pour order 65): -8.89,60.071
GND on Bottom Layer "Bottom Layer-GND" (solid, remove dead copper, pour order 67): 0,0 90,0 90,60 0,60

## Keep-outs
Keep-Out Layer:
  lines w0.254: 0,2 ccw(c2,2) 2,0 88,0 ccw(c88,2) 90,2 90,15 84,21 84,39 90,45 90,58 ccw(c88,58) 88,60 2,60 ccw(c2,58) 0,58 0,2

## Silkscreen, mask and mechanical layers (free items; w line width, h text height)
Top Overlay:
  text "BLE MESH开发板 / V0.3  BY AIKE" at 42.325,27.575 h3
Mechanical 1:
  circle w0.254: c12.1,21.3 r2
  circle w0.254: c26.7,53.6 r2
  circle w0.254: c84.2,12.7 r2
  circle w0.254: c84.1,49.3 r2

## Text inside footprints (layer, text, board x,y; h text height)
J2: Top Overlay "1" at 45.339,10.795 h1.27; Top Overlay "2" at 45.339,8.382 h1.27; Top Overlay "4" at 38.354,8.128 h1.27; Top Overlay "3" at 38.354,10.795 h1.27